# Altium PCB Button.PcbDoc
Units mil, origin at the board's own origin, x right, y up, seen from the top; angles counter-clockwise.
Board outline 6000 x 4000 mil, 2 copper layers (Top Layer, Bottom Layer); 3 components, 3 nets, 10 pads, 1 vias.
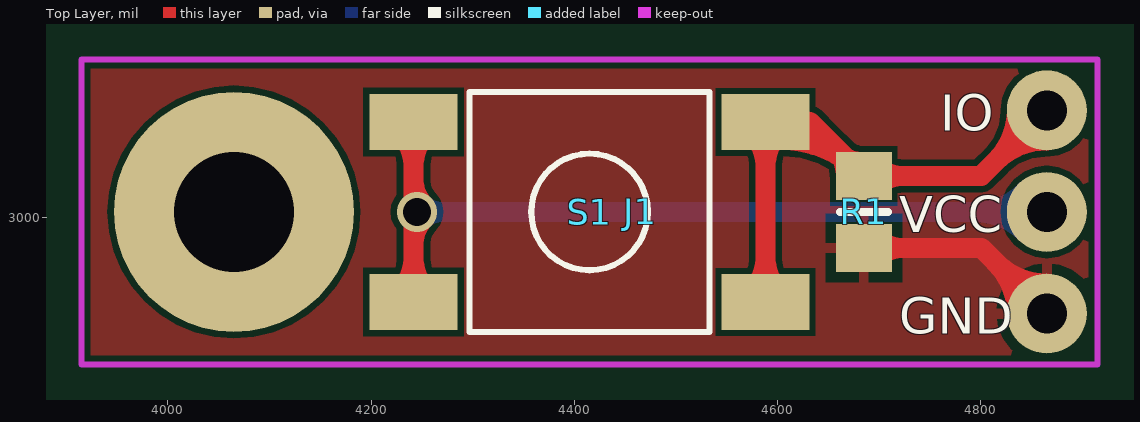
[diagram p0: Top Layer view]
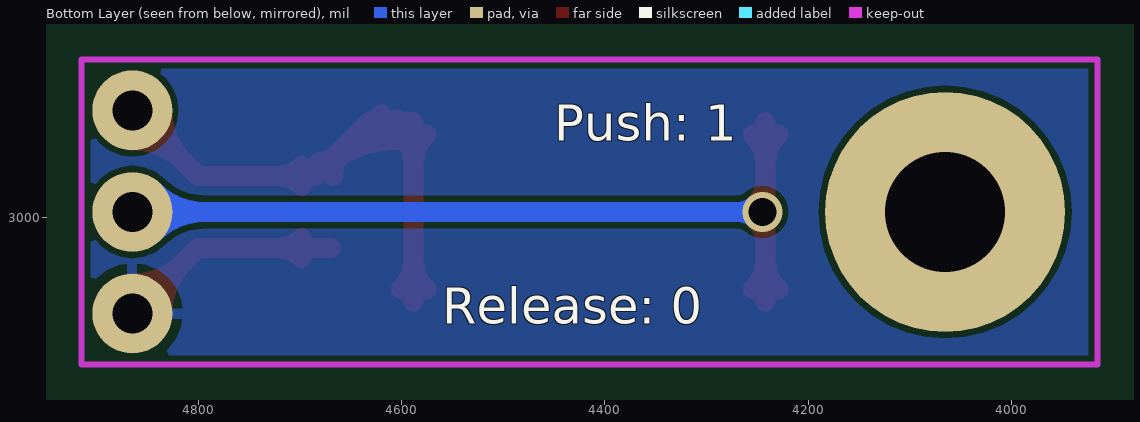
[diagram p1: Bottom Layer view, seen from below]

## Layer stack, top to bottom
Top Solder: solder mask 0.4, Solder Resist, Dk 3.5
Top Layer: signal copper 1.4
Dielectric 1: dielectric 12.6, FR-4, Dk 4.8
Bottom Layer: signal copper 1.4
Bottom Solder: solder mask 0.4, Solder Resist, Dk 3.5

## Board outline
1000,1000 7000,1000 7000,5000 1000,5000

## Design rules (kind name [scope] priority, off if disabled: settings)
Clearance [All] p1: gap=6
ComponentClearance [All] p1: gap=0 collisioncheckmode=3 verticalgap=0 showdistances=FALSE
PolygonConnect [All] p1: connectstyle=Relief reliefconductorwidth=10 reliefentries=4 polygonreliefangle="90 Angle" airgapwidth=10
RoutingVias [All] p1: holewidth=28 width=50 viastyle="Through Hole" minholewidth=28 minwidth=50 maxholewidth=28 maxwidth=50
SolderMaskExpansion [All] p1: expansion=4
Width [All] p1: maxlimit=100 minlimit=6 preferedwidth=10
28 further rules are at their usual default settings.

## Components (designator, comment, footprint, x,y, rotation, side; value= is the part's Value field where it differs from the comment)
J1 "CON3" DevModule 4415,3005 r0 top
R1 "470R" 6-0805_N 4685,3005 r90 top
S1 "Button" KFCA06 4415,3005 r180 top

## Footprints (in the part's own frame and the unit in brackets; to place one, negate y for a bottom-side part, rotate by r counter-clockwise, add the part's x,y. Pads: shape width x height; smd on the part's side, far side on the other; paste and mask are expansions set on the pad)
6-0805_N [mm] "Chip Resistor, Body 2.0x1.2mm, IPC Medium Density"
  rect 1.2x1.4 smd: 1(-0.9,0) 2(0.9,0)
  silkscreen extent 0,-0.6 0,0.6, body extent -1.07,-0.7 1.07,0.7, height 0.7
DevModule [mm]
  round 6 hole 3: 0(-8.89,0)
  round 2 hole 1: 1(11.43,2.54) 2(11.43,0) 3(11.43,-2.54)
  Keep-Out Layer lines w0.152: -12.7,-3.81 -12.7,3.81 12.7,3.81 12.7,-3.81 -12.7,-3.81
KFCA06 [mm]
  rect 2.2x1.4 smd: 1(-4.4,-2.25) 1(-4.4,2.25) 2(4.4,-2.25) 2(4.4,2.25)
  silkscreen extent -3,-3 3,3

## Part data
J1: "Connector"
R1: library part RES1_1
S1: library part SW-PB

## Via types
v1: diameter 39.37, hole 27.56, Top Layer to Bottom Layer, tented both sides, 1 vias

## Nets (pads, with @x,y where several pads share a name; then routed paths per layer and width w, separated by ;. In a path a pad name is that pad's centre, name@x,y a point inside that pad or via, vN(x,y) a via of type N, cw(c..) or ccw(c..) an arc to the next point about the centre after c; other vN are vias at no path point)
GND: J1.3 R1.1 | length 384.8
  Top Layer w20: R1.1@4670,2969.57 4800.43,2969.57 J1.3 ; R1.1@4698.57,2959.93 cw(c4721.82,2936.68) 4721.82,2969.57 cw(c4721.82,3002.45) R1.1@4698.57,2979.2 ; J1.3@4835.63,2905 ccw(c4764.72,2905) 4814.86,2955.14 ccw(c4865,3005.28) J1.3@4865,2934.37
NetJ1_1: J1.1 R1.2 S1.1 | length 1014.9
  Top Layer w20: S1.1@4575.81,2928.83 ccw(c4545.84,2958.81) 4588.23,2958.81 ccw(c4630.62,2958.81) S1.1@4600.64,2928.83 ; S1.1@4575.81,3081.17 cw(c4545.84,3051.19) 4588.23,3051.19 cw(c4630.62,3051.19) S1.1@4600.64,3081.17 ; S1.1@4588.23,2916.42 4588.23,3093.58 4631.85,3093.58 ; S1.1@4603.98,3076.02 cw(c4603.98,2966.34) R1.2@4681.54,3043.9 ; S1.1@4603.98,3096.02 cw(c4603.98,3034.62) 4647.39,3078.04 ; S1.1@4619.81,3086 cw(c4631.85,3080.24) 4631.85,3093.58 ; S1.1@4619.81,3101.16 ccw(c4631.85,3106.93) 4631.85,3093.58 ; 4655.02,3070.41 cw(c4625.05,3040.43) R1.2@4667.44,3040.43 ; R1.2@4664.53,3060.9 ccw(c4681.06,3077.44) R1.2@4681.06,3054.06 ; R1.2@4698.57,3030.8 cw(c4721.82,3007.55) 4721.82,3040.43 cw(c4721.82,3073.32) R1.2@4698.57,3050.07 ; J1.1@4835.63,3105 cw(c4764.72,3105) 4814.86,3054.86 cw(c4865,3004.72) J1.1@4865,3075.63 ; J1.1 4800.43,3040.43 R1.2 4631.85,3093.58
VCC: J1.2 S1.2 | length 1132.5
  Top Layer w20: S1.2@4229.36,2928.83 ccw(c4199.38,2958.81) 4241.77,2958.81 ccw(c4284.16,2958.81) S1.2@4254.19,2928.83 ; S1.2@4229.36,3081.17 cw(c4199.38,3051.19) 4241.77,3051.19 cw(c4284.16,3051.19) S1.2@4254.19,3081.17 ; S1.2@4241.77,2916.42 S1.2@4241.77,3093.58 ; 4241.77,2973.82 cw(c4276.18,2973.82) v1@4251.85,2998.15 ; 4241.77,3036.18 ccw(c4276.18,3036.18) v1@4251.85,3011.85
  Bottom Layer w20: v1(4245,3005) J1.2 ; v1@4251.85,2998.15 cw(c4268.38,2981.62) 4268.38,3005 cw(c4268.38,3028.38) v1@4251.85,3011.85 ; J1.2@4844.23,2984.23 ccw(c4794.09,2934.09) 4794.09,3005 ccw(c4794.09,3075.91) J1.2@4844.23,3025.77
pads on no net: J1.0

## Polygon pours and split planes (outlines as drawn)
GND on Top Layer "Keep-Out Layer-No Net" (solid, pour order 2): 3916.44,3156.4 4916.44,3156.4 4916.44,2856.4 3916.44,2856.4
GND on Bottom Layer "Keep-Out Layer-No Net" (solid, pour order 4): 4915,3155 4915,2855 3915,2855 3915,3155

## Silkscreen, mask and mechanical layers (free items; w line width, h text height)
Top Overlay:
  text "IO" at 4760,3085 h35.43
  text "VCC" at 4720,2985 h35.43
  text "GND" at 4720,2885 h35.43
Bottom Overlay:
  text "Push: 1" at 4450,3075 h35.43
  text "Release: 0" at 4560,2895 h35.43